# EAGLE board PCB_midrat v2 (EAGLE 9.7.0)
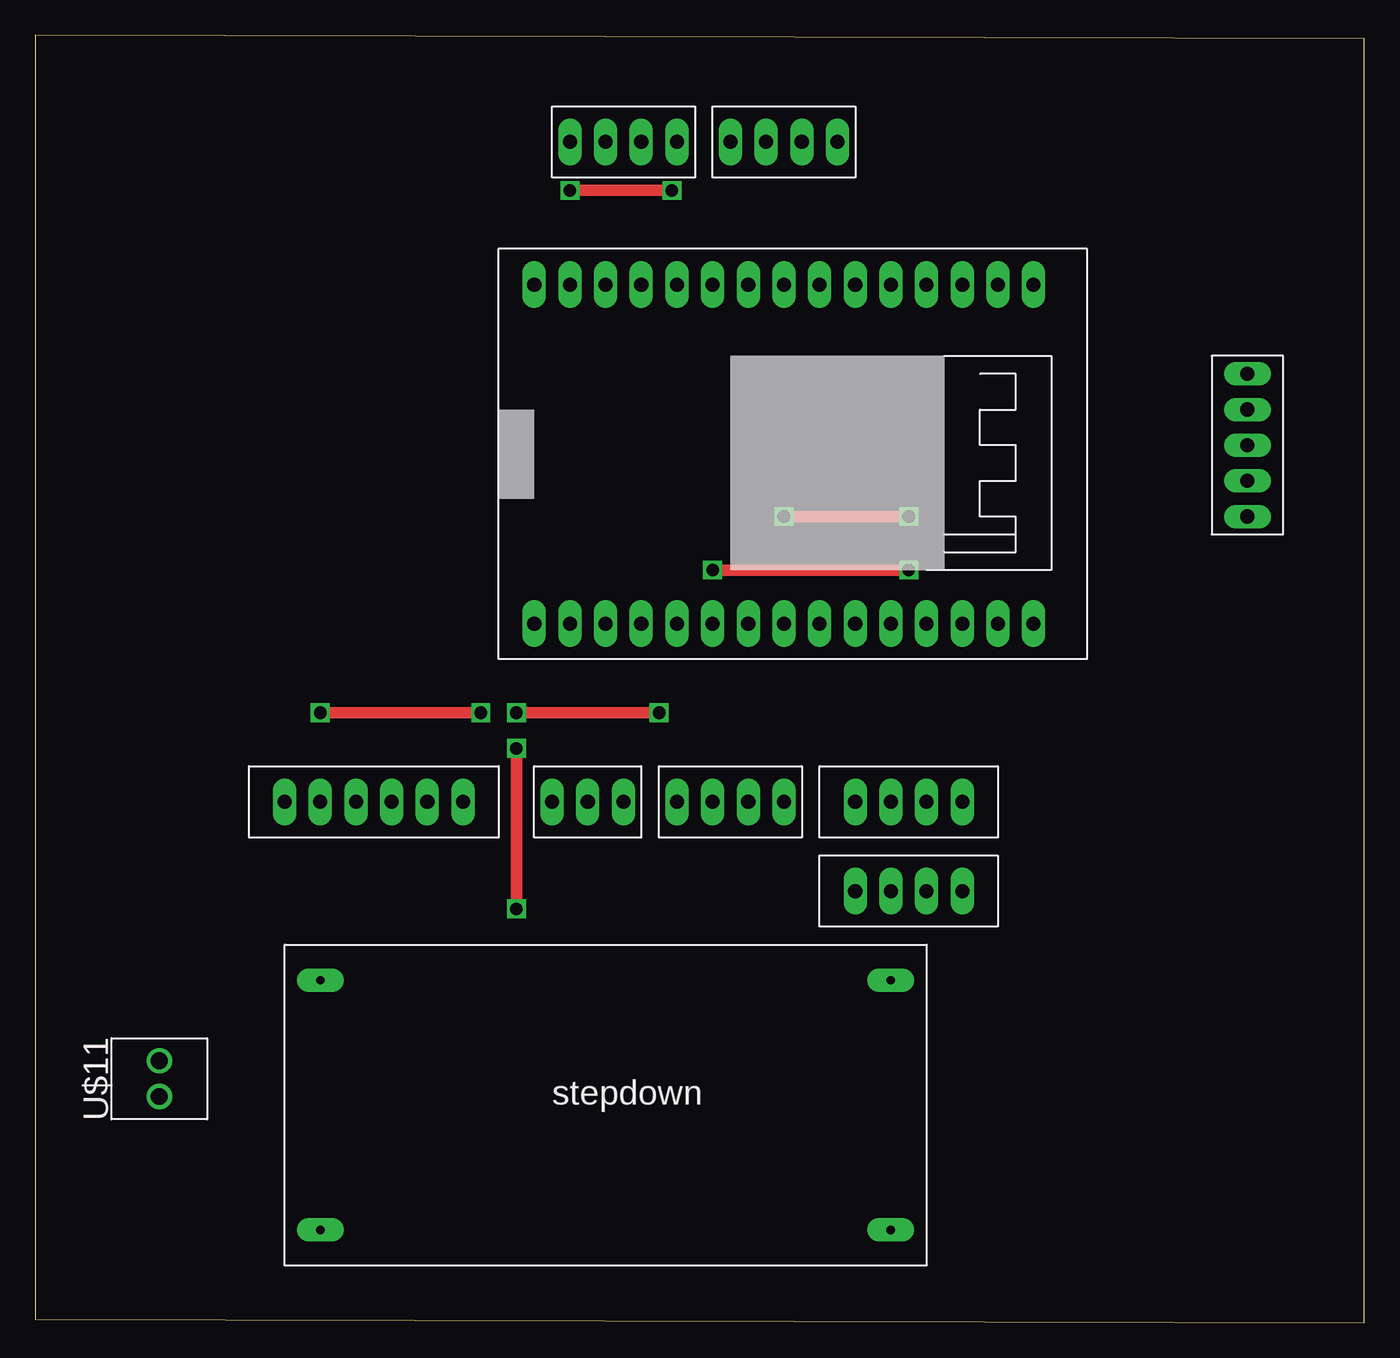
[diagram p0: board, top side]
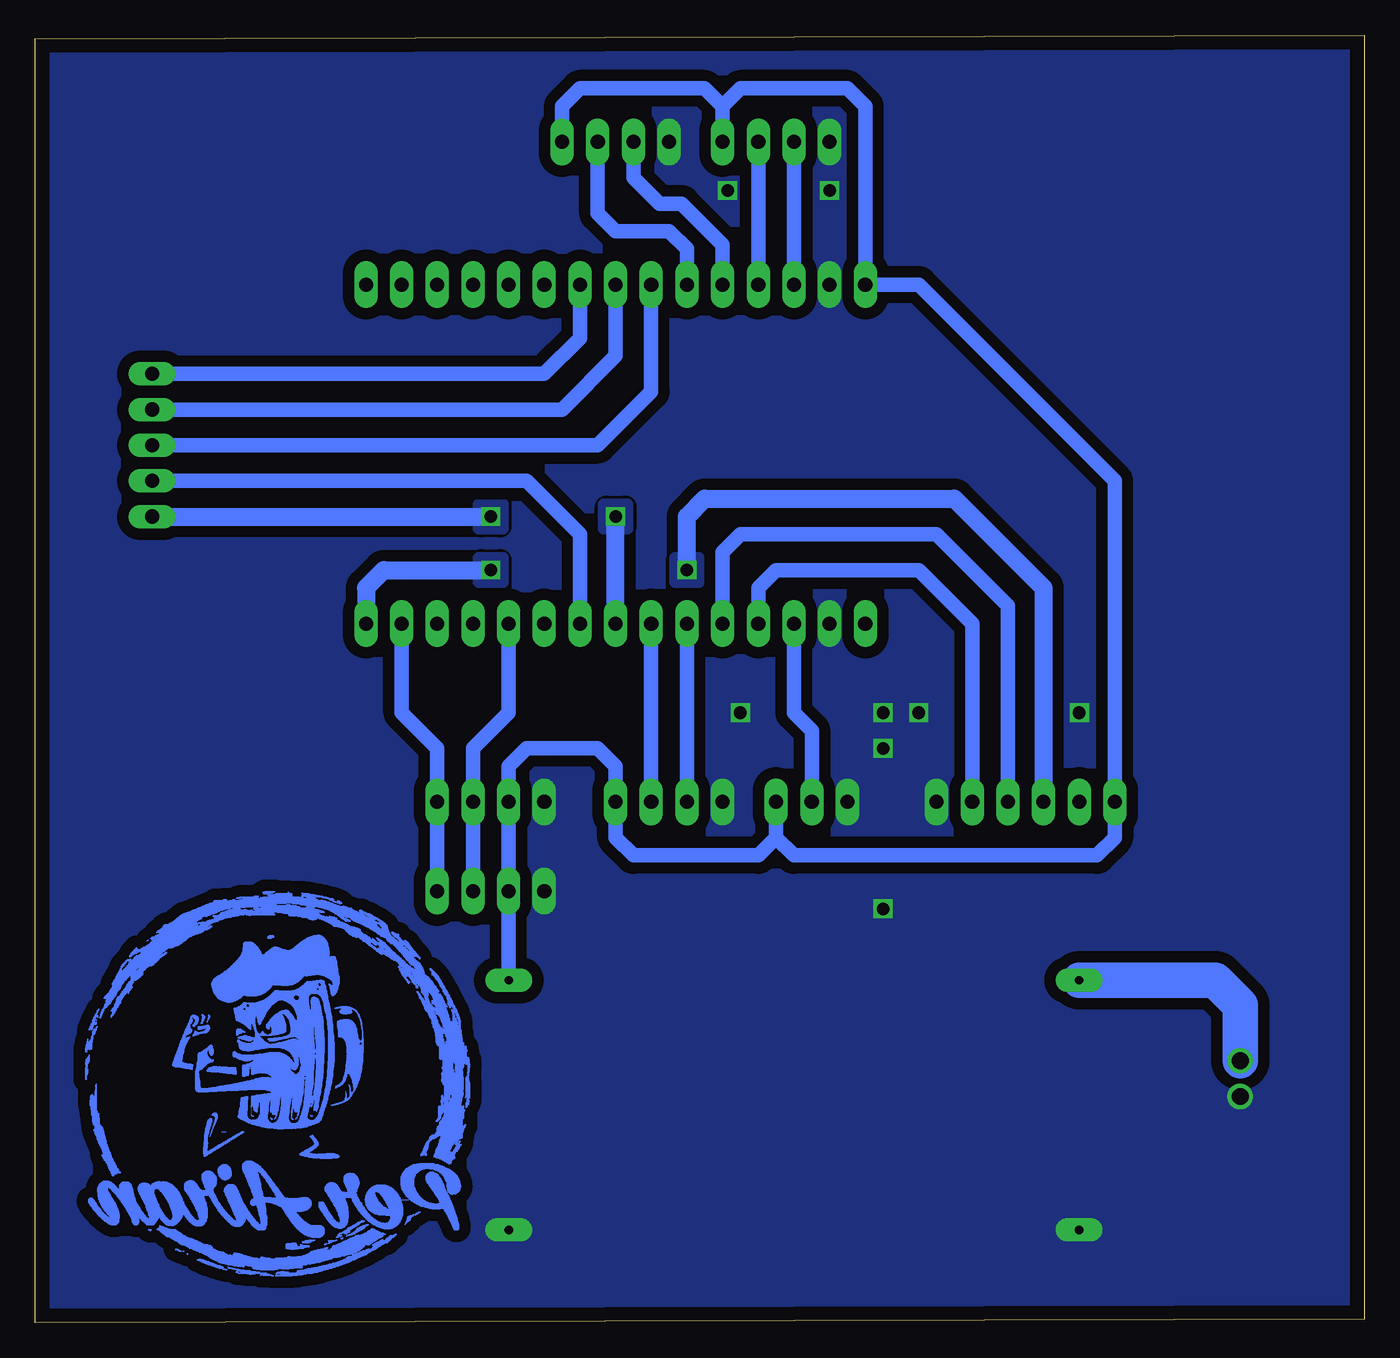
[diagram p1: board, bottom side, seen from below]

Size 94.69 x 91.68 mm. Coordinates in mm from the lower left corner, seen from the top.
Outline: 0,0.25 94.69,0 94.69,91.43 0,91.68 0,0.25
Copper layers (1*16): Top 0.035mm / dielectric 1.5mm / Bottom 0.035mm
Design rules "default": minimum track width 6mil, minimum drill 0.35mm, track to track 6mil, track to pad 6mil, pad to pad 6mil, via to via 6mil, smd to smd 6mil, copper to edge 40mil, drill to drill 6mil, minimum pad ring 10mil, minimum via ring 8mil, stop-mask expansion 4mil, vias tented up to drill 0mil, thermal gap 10mil

## Footprints (pad centres in the part's own frame; a part is rotated, then mirrored left to right if it is on the bottom)
ESP32_30PIN = drill 1 pad 1.676 long: 3V3 26.67,2.54; 5V 2.54,2.54; D2 26.67,10.16; D4 26.67,12.7; D5 26.67,20.32; D12 2.54,10.16; D13 2.54,7.62; D14 2.54,12.7; D15 26.67,7.62; D18 26.67,22.86; D19 26.67,25.4; D21 26.67,27.94; D22 26.67,35.56; D23 26.67,38.1; D25 2.54,20.32; D26 2.54,17.78; D27 2.54,15.24; D32 2.54,25.4; D33 2.54,22.86; D34 2.54,30.48; D35 2.54,27.94; EN 2.54,38.1; GND 2.54,5.08; GND1 26.67,5.08; RX 26.67,30.48; RX2 26.67,15.24; TX 26.67,33.02; TX2 26.67,17.78; VN 2.54,33.02; VP 2.54,35.56
KEYPAD2X3 = drill 1 pad 1.676 long: C1 -2.54,6.35; C2 -2.54,8.89; C3 -2.54,11.43; R1 -2.54,1.27; R2 -2.54,3.81
LCD_I2C = drill 1 pad 1.676 long: GND -2.54,10.16; SCL -2.54,2.54; SDA -2.54,5.08; VCC -2.54,7.62
LOADCELL = drill 1 pad 1.676 long: DT -2.54,6.35; GND -2.54,8.89; SCK -2.54,3.81; VCC -2.54,1.27
PZEM0004 = drill 1 pad 1.676 long: 5V -2.54,1.27; GND -2.54,8.89; RX -2.54,3.81; TX -2.54,6.35
RELAY_4CHANNEL = drill 1 pad 1.676 long: GND -15.24,2.54; IN1 -12.7,2.54; IN2 -10.16,2.54; IN3 -7.62,2.54; IN4 -5.08,2.54; VCC -2.54,2.54
XL4005E1 = drill 0.6 pad 1.676 long: IN+ 2.54,20.32; IN- 2.54,2.54; OUT- 43.18,2.54; OUTT+ 43.18,20.32
DHT = drill 1 pad 1.676 long: DATA -2.54,3.81; GND -2.54,6.35; VCC -2.54,1.27
TERMBLK_254-2N = drill 1.2: 1 0,0; 2 2.54,0

## Placement (x,y rotation side)
U$1  ESP32_30PIN  [ESP32_30PIN]  33.02,76.45 270 top
U$2  KEYPAD_2X3  [KEYPAD2X3]  88.9,56.13 0 top
U$3  LCD_I2C  [LCD_I2C]  68.58,39.62 90 top
U$4  LOADCELL  [LOADCELL]  46.99,86.61 90 top
U$5  PZEM0004  [PZEM0004]  54.61,39.62 90 top
U$6  RELAY_4CHANNEL  [RELAY_4CHANNEL]  15.24,39.62 180 top
U$7  LOADCELL  [LOADCELL]  58.42,86.61 90 top
U$8  LCD_I2C  [LCD_I2C]  68.58,33.27 90 top
U$9  XL4005E1  [XL4005E1]  17.78,4.06 0 top
U$10  DHT  [DHT]  43.18,39.62 90 top
U$11  2828XX-2282834-2  [TERMBLK_254-2N]  8.85,18.64 270 top

## Library data of the parts
U$1 U$2 U$4 U$5 U$7 U$9 U$10 = FusionLocal
U$3 U$6 U$8 = LocalLib
U$11 = Connector

## Nets
5V: U$1.5V U$3.VCC U$4.VCC U$5.5V U$6.VCC U$7.VCC U$8.VCC U$9.OUTT+ U$10.VCC
FAN: U$1.D2 U$6.IN1
GND: U$1.GND U$1.GND1 U$3.GND U$4.GND U$5.GND U$6.GND U$7.GND U$8.GND U$9.IN- U$9.OUT- U$10.GND U$11.2
HEATER1: U$1.D4 U$6.IN2
HEATER2: U$1.D23 U$6.IN3
N$1: U$1.D13 U$4.DT
N$2: U$1.D12 U$4.SCK
N$3: U$1.D14 U$7.DT
N$4: U$1.D27 U$7.SCK
N$5: U$1.D26 U$2.C1
N$6: U$1.D25 U$2.C2
N$7: U$1.D33 U$2.C3
N$8: U$1.D5 U$2.R1
N$9: U$1.D18 U$2.R2
N$10: U$1.RX2 U$5.TX
N$11: U$1.TX2 U$5.RX
N$12: U$1.D15 U$10.DATA
N$13: U$9.IN+ U$11.1
SCL: U$1.D22 U$3.SCL U$8.SCL
SDA: U$1.D21 U$3.SDA U$8.SDA

## Tracks (layer width: path | path; a pad name or v marks a point on that pad's centre or on a via)
5V
  Bottom 1.016: U$4.VCC 45.72,86.61 | 45.72,86.61 46.99,87.88 55.88,87.88 57.15,86.61 U$7.VCC | 45.72,86.61 44.45,87.88 36.83,87.88 35.56,86.61 U$1.5V 31.75,73.91 17.78,59.94 U$6.VCC 17.78,34.54 19.05,33.27 40.64,33.27 41.91,34.54 | U$9.OUTT+ U$8.VCC U$3.VCC 60.96,39.62 59.69,40.89 54.61,40.89 53.34,39.62 U$5.5V 53.34,34.54 52.07,33.27 43.18,33.27 41.91,34.54 | U$10.VCC 41.91,34.54
FAN
  Bottom 1.016: U$6.IN1 27.94,49.78 31.75,53.59 41.91,53.59 43.18,52.32 U$1.D2
GND  (via drill 0.9 pad 1.3)
  Top 0.813: v34.29,43.43 v44.45,43.43 | v34.29,29.46 v34.29,40.89 | v20.32,43.43 v31.75,43.43 | v38.1,80.62 v45.36,80.62
  pour Bottom (isolate 0.813, no thermals): 0.13,-0.51 94.18,-0.51 94.18,91.67 0.13,91.67
HEATER1
  Bottom 1.016: U$6.IN2 25.4,51.05 30.48,56.13 44.45,56.13 45.72,54.86 U$1.D4
HEATER2  (via drill 0.9 pad 1.3)
  Top 0.813: v62.23,53.59 v48.26,53.59
  Bottom 1.27: U$1.D23 71.12,52.32 69.85,53.59 v62.23,53.59 | v48.26,53.59 48.26,57.4 46.99,58.67 29.21,58.67 22.86,52.32 U$6.IN3
  pour Bottom (isolate 0.813, no thermals): 47.4,52.73 49.12,52.73 49.12,54.46 47.4,54.46
  pour Bottom (isolate 0.813, no thermals): 61.37,52.73 63.09,52.73 63.09,54.46 61.37,54.46
N$1
  Bottom 1.016: U$4.DT U$1.D13
N$2
  Bottom 1.016: U$1.D12 U$4.SCK
N$3
  Bottom 1.016: U$1.D14 45.72,76.76 48.64,79.68 50.22,79.68 52.07,81.53 U$7.DT
N$4
  Bottom 1.016: U$1.D27 48.26,76.45 49.53,77.72 53.34,77.72 54.61,78.99 U$7.SCK
N$5
  Bottom 1.016: U$2.C1 54.61,62.48 50.8,66.29 U$1.D26
N$6
  Bottom 1.016: U$2.C2 57.15,65.02 53.34,68.83 U$1.D25
N$7
  Bottom 1.016: U$2.C3 58.42,67.56 55.88,70.1 U$1.D33
N$8  (via drill 0.9 pad 1.3)
  Top 0.813: v53.34,57.4 v62.23,57.4
  Bottom 1.27: U$2.R1 v62.23,57.4 | U$1.D5 v53.34,57.4
  pour Bottom (isolate 0.813, no thermals): 61.37,56.54 63.09,56.54 63.09,58.27 61.37,58.27
  pour Bottom (isolate 0.813, no thermals): 52.48,56.54 54.2,56.54 54.2,58.27 52.48,58.27
N$9
  Bottom 1.016: U$1.D18 55.88,56.13 59.69,59.94 U$2.R2
N$10
  Bottom 1.016: U$5.TX U$1.RX2
N$11
  Bottom 1.016: U$5.RX U$1.TX2
N$12
  Bottom 1.016: U$10.DATA 39.37,42.16 40.64,43.43 U$1.D15
N$13
  Bottom 2.54: U$9.IN+ 10.62,24.38 8.85,22.62 U$11.1
SCL
  Bottom 1.016: U$8.SCL U$3.SCL 66.04,40.89 68.58,43.43 U$1.D22
SDA
  Bottom 1.016: U$8.SDA U$3.SDA 63.5,40.89 60.96,43.43 U$1.D21
(copper drawn outside any net)
  shapes: Bottom area x9717